# EAGLE board Wheel_Encoder_Adapter_Schmitt (EAGLE 5.11)
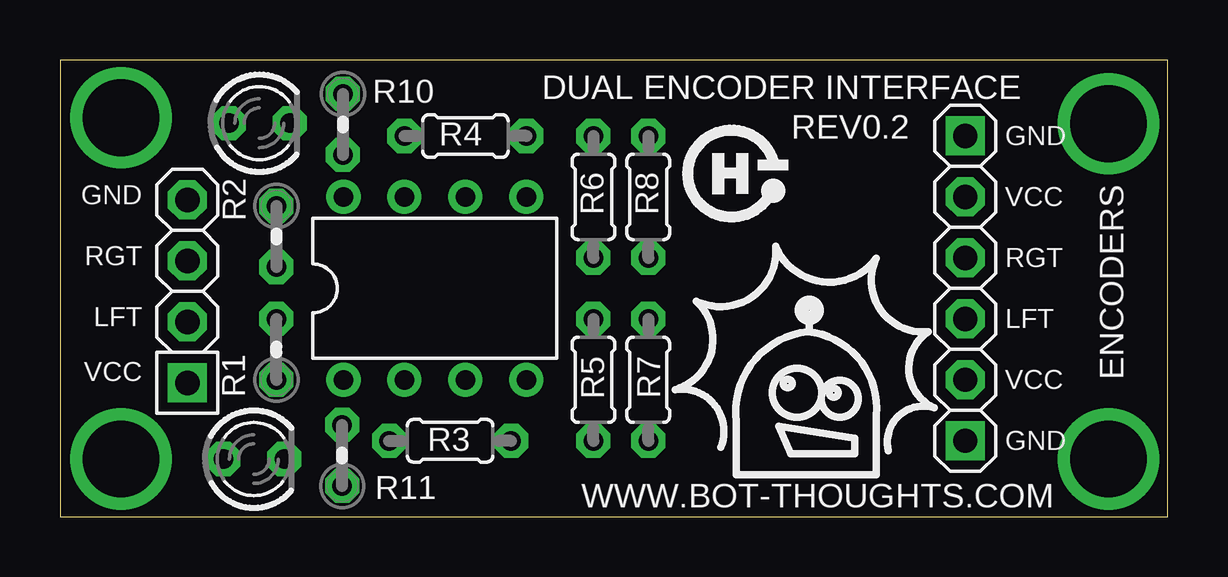
[diagram p0: board, top side]
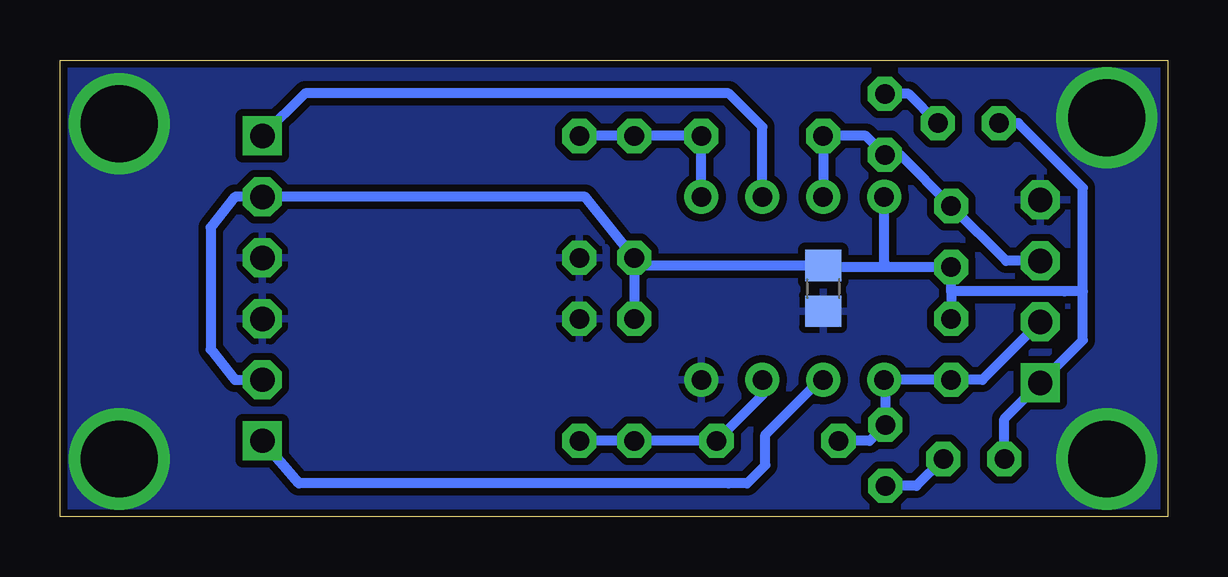
[diagram p1: board, bottom side, seen from below]

Size 46.15 x 19.04 mm. Coordinates in mm from the lower left corner, seen from the top.
Outline: 0,0 46.15,0 46.15,19.04 0,19.04 0,0
Copper layers (1*16): Top 0.035mm / dielectric 1.5mm / Bottom 0.035mm
Design rules "SparkFun": minimum track width 8mil, minimum drill 20mil, track to track 8mil, track to pad 8mil, pad to pad 8mil, via to via 8mil, smd to smd 8mil, copper to edge 10mil, drill to drill 8mil, minimum pad ring 12mil, minimum via ring 10mil, stop-mask expansion 4mil, vias tented up to drill 25mil, thermal gap 10mil

## Footprints (pad centres in the part's own frame; a part is rotated, then mirrored left to right if it is on the bottom)
C0805 = smd 1.3 x 1.5: 1 -0.95,0; 2 0.95,0
DIL08 = drill 0.813 pad 1.27 round: 1 -3.81,-3.81; 2 -1.27,-3.81; 3 1.27,-3.81; 4 3.81,-3.81; 5 3.81,3.81; 6 1.27,3.81; 7 -1.27,3.81; 8 -3.81,3.81
1X03-S = drill 1.016 square: 1 -2.54,0 | drill 1.016 octagon: 2 0,0; 3 2.54,0
1X04-S = drill 1.016 square: 1 -3.81,0 | drill 1.016 octagon: 2 -1.27,0; 3 1.27,0; 4 3.81,0
LED3MM = drill 0.813 octagon: A -1.27,0; K 1.27,0
0204V = drill 0.813 octagon: 1 -1.27,0; 2 1.27,0
0204/5 = drill 0.813 octagon: 1 -2.54,0; 2 2.54,0

## Placement (x,y rotation side)
C1  1uF  [C0805]  14.35,9.53 270 bottom
IC1  LM393N  [DIL08]  15.62,9.53 0 top
JP1  IN_LEFT  [1X03-S]  37.72,5.71 90 top
JP2  IN_RIGHT  [1X03-S]  37.72,13.34 270 top
JP3  MCU  [1X04-S]  5.31,9.4 90 top
LED1  LEFT  [LED3MM]  8.08,2.41 0 top
LED2  RIGHT  [LED3MM]  8.31,16.41 0 top
R1  10K  [0204V]  9.02,6.99 90 top
R2  10K  [0204V]  9.02,11.68 270 top
R3  51K  [0204/5]  16.26,3.17 180 top
R4  51K  [0204/5]  16.89,15.88 180 top
R5  56K  [0204/5]  22.22,5.71 90 top
R6  56K  [0204/5]  22.22,13.34 270 top
R7  12K  [0204/5]  24.51,5.71 270 top
R8  12K  [0204/5]  24.51,13.34 90 top
R10  100  [0204V]  11.79,16.36 270 top
R11  100  [0204V]  11.76,2.57 90 top
U$1  [BOT-THOUGHTS]  31.47,4.04 0 top
U$2  OSHW-LOGO  [OSHW-LOGO]  27.94,14.35 0 top

## Library data of the parts
C1 = rcl; PARTNO: C1608X5R0J105K
IC1 = linear
JP1 JP2 = pinhead-2; BOM: EXCLUDE
JP3 = pinhead-2
LED1 LED2 = led; BOM: EXCLUDE
R1-R4 R7 R8 = resistor; PARTNO: ERJ-6ENF1002V
R5 R6 = resistor; PARTNO: CRCW08051K00FKEA
R10 R11 = resistor; PARTNO: CRCW0805330RFKEA
U$1 = mes
U$2 = SparkFun

## Nets
GND: C1.2 IC1.4 JP1.3 JP2.3 JP3.4 R7.1 R8.1
IN_LEFT: IC1.2 JP1.1
IN_RIGHT: IC1.6 JP2.1
N$1: LED1.K R11.1
N$2: IC1.3 R3.1 R5.1 R7.2
N$3: LED2.K R10.1
N$7: IC1.5 R4.1 R6.1 R8.2
OUT_LEFT: IC1.1 JP3.2 R1.1 R3.2 R11.2
OUT_RIGHT: IC1.7 JP3.3 R2.1 R4.2 R10.2
VCC: C1.1 IC1.8 JP1.2 JP2.2 JP3.1 LED1.A LED2.A R1.2 R2.2 R5.2 R6.2

## Tracks (layer width: path | path; a pad name or v marks a point on that pad's centre or on a via)
GND  (via drill 3.2)
  other vias: 2.54,16.64 2.54,2.41 43.69,16.38 43.69,2.41
  pour Bottom (isolate 0.305): 0,0 0,19.05 46.1,19.05 46.1,0
IN_LEFT
  Bottom 0.406: JP1.1 36.19,1.4 18.29,1.4 17.53,1.4 16.76,2.16 16.76,3.43 14.48,5.71 IC1.2
IN_RIGHT
  Bottom 0.406: IC1.6 16.89,16.26 18.29,17.65 35.94,17.65 JP2.1
N$1
  Bottom 0.406: R11.1 10.46,1.29 LED1.K
N$2
  Bottom 0.406: IC1.3 16.89,5.08 R3.1 R5.1 R7.2
N$3
  Bottom 0.406: R10.1 10.79,17.63 LED2.K
N$7
  Bottom 0.406: IC1.5 R4.1 R6.1 R8.2
OUT_LEFT
  Bottom 0.406: R3.2 12.42,3.17 R11.2 11.76,5.66 IC1.1 R1.1 7.72,5.71 JP3.2
OUT_RIGHT
  Bottom 0.406: IC1.7 R4.2 12.57,15.88 R10.2 11.15,15.09 R2.1 6.73,10.67 JP3.3
VCC
  Bottom 0.406: R6.2 24.26,13.34 JP2.2 38.86,13.34 39.88,12.06 39.88,6.99 38.86,5.71 JP1.2 | R6.2 R5.2 | R6.2 21.9,10.47 21.66,10.47 C1.1 14.29,10.41 11.66,10.41 | 9.02,9.4 R1.2 | 9.02,9.4 R2.2 11.66,10.41 | IC1.8 11.81,10.57 11.66,10.41 | JP3.1 5.05,5.59 | 9.02,9.4 4.29,9.4 3.53,9.4 | LED1.A 6.81,4.09 JP3.1 | LED2.A 6.22,16.41 3.53,13.72 3.53,9.4 | 3.53,9.4 3.53,7.37 JP3.1

## Text on the board
tNames: DUAL ENCODER INTERFACE | REV0.2 | GND | GND | VCC | RGT | RGT | LFT | LFT | VCC | ENCODERS | VCC | GND | WWW.BOT-THOUGHTS.COM
_tsilk: R10 | DUAL ENCODER INTERFACE | REV0.2 | R4 | GND | GND | R6 | R8 | VCC | R2 | RGT | RGT | LFT | LM393N | MCU | LFT | VCC | ENCODERS | R1 | R5 | R7 | VCC | R3 | GND | R11 | WWW.BOT-THOUGHTS.COM